# EAGLE board (transfer file) [Eagle] PCIE_Arduino_Alpha1.0 ES (EAGLE 9.6.2), part 1 of 6
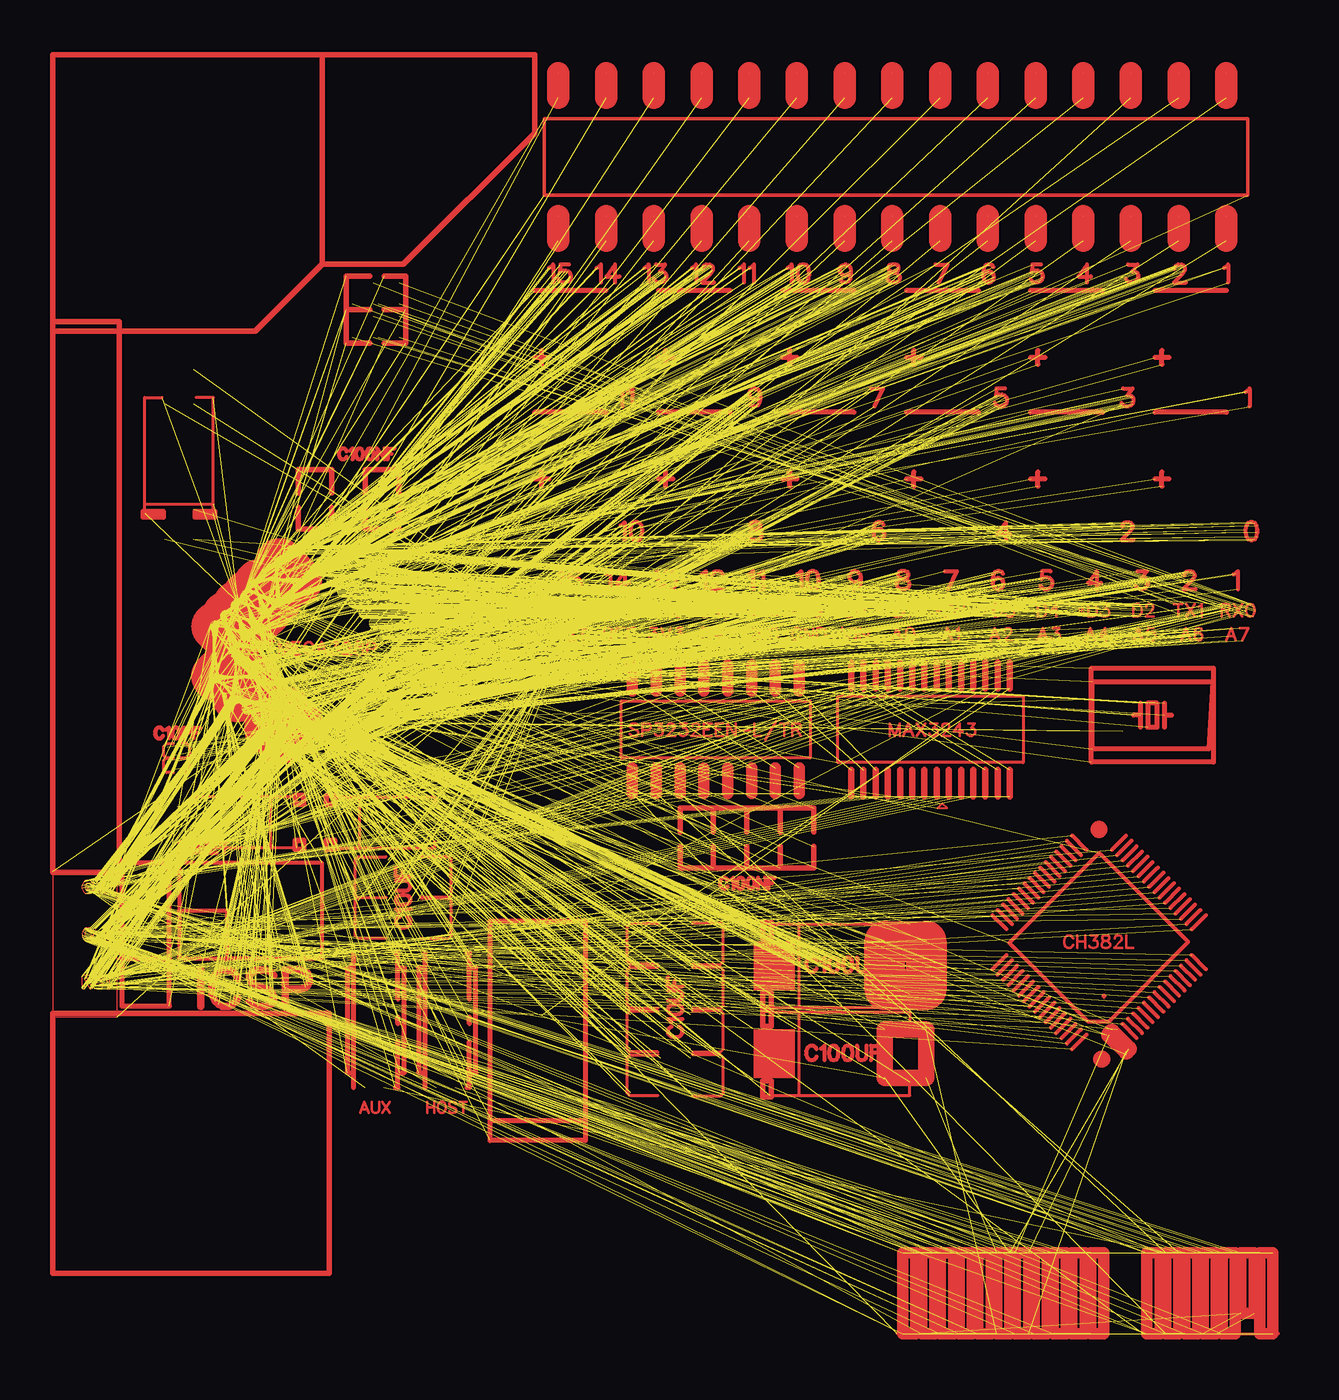
[diagram p0: board, top side]
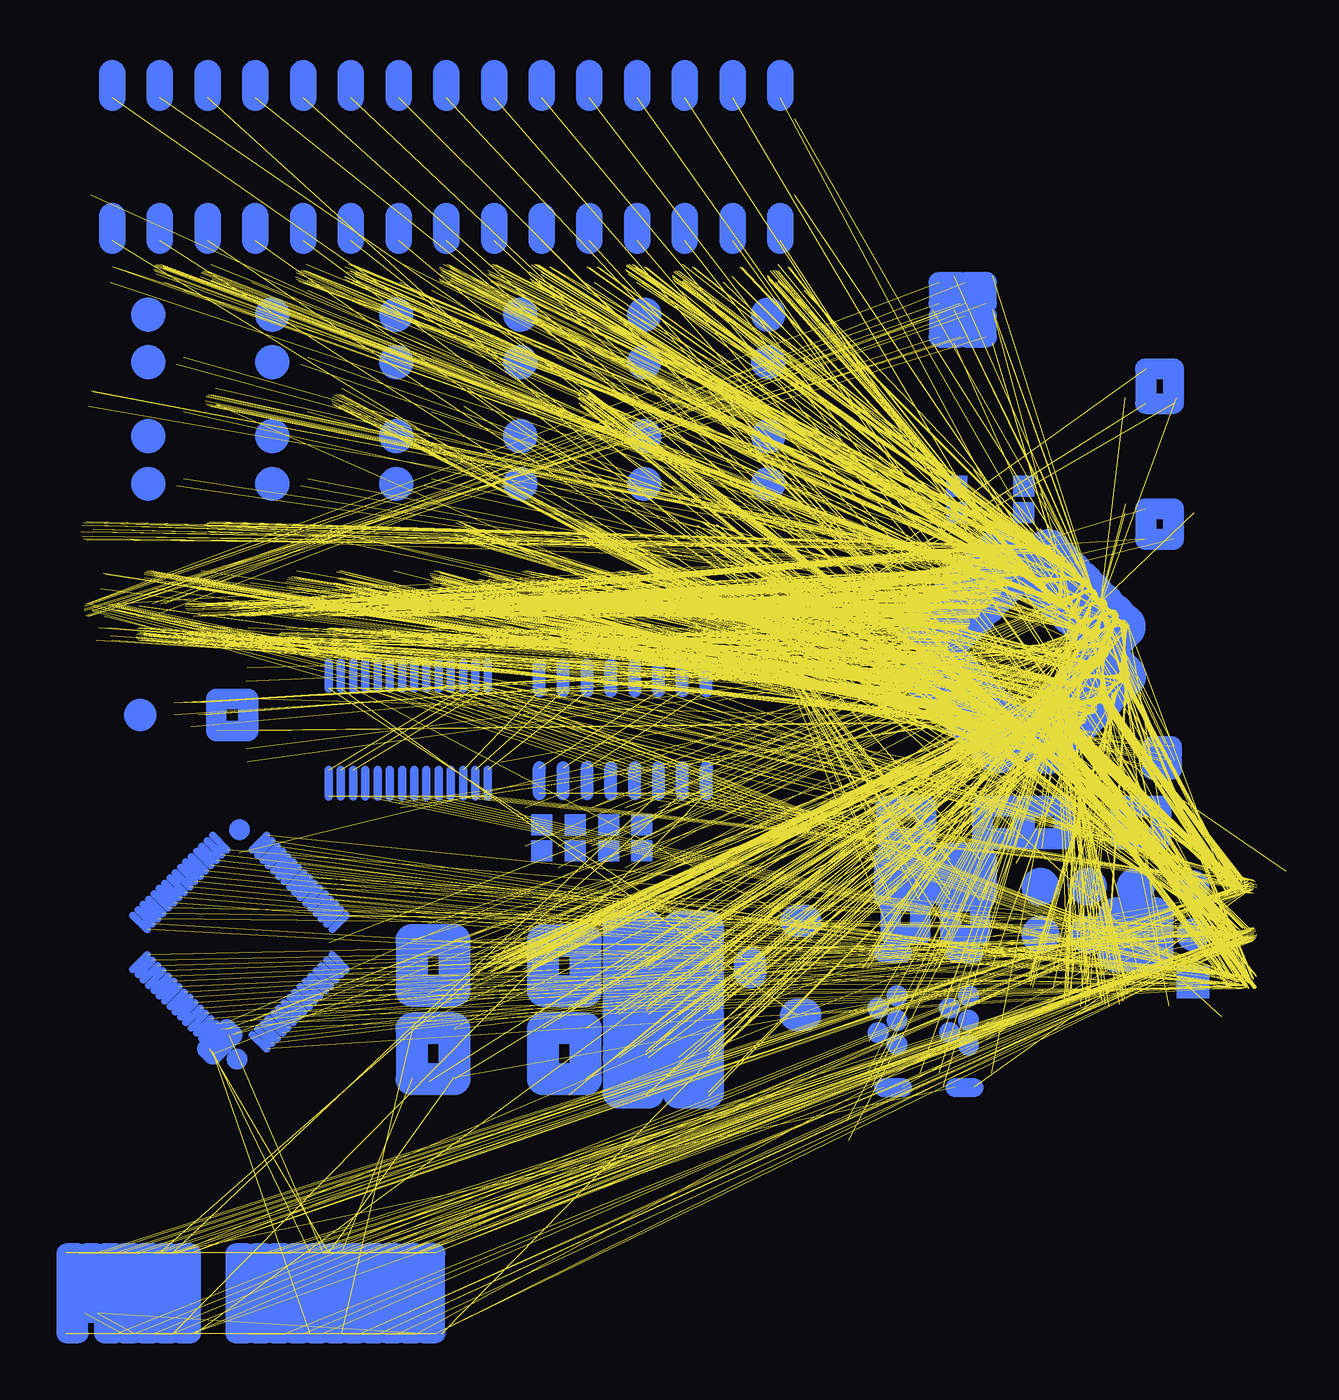
[diagram p1: board, bottom side, seen from below]

No outline drawn. Coordinates in mm, seen from the top.
Copper layers (1*16): Top 0.035mm / dielectric 1.5mm / Bottom 0.035mm
Design rules "default": minimum track width 6mil, minimum drill 0.35mm, track to track 6mil, track to pad 6mil, pad to pad 6mil, via to via 6mil, smd to smd 6mil, copper to edge 40mil, drill to drill 6mil, minimum pad ring 10mil, minimum via ring 8mil, stop-mask expansion 4mil, vias tented up to drill 0mil, thermal gap 10mil

## Placement (x,y rotation side)

## Tracks (layer width: path | path; a pad name or v marks a point on that pad's centre or on a via)
S$1  (2 unrouted)
  Top 0: 3.56,25.92 0.13,25.92
  Top 1.2: 62.61,68.42 62.61,67.12
  Bottom 1.403: 62.61,68.42 62.61,67.12
S$2  (2 unrouted)
  Top 0: 0.13,25.92 0.13,18.18
  Top 1.2: 60.07,68.42 60.07,67.12
  Bottom 1.403: 60.07,68.42 60.07,67.12
S$3  (2 unrouted)
  Top 0: 0.13,18.18 3.56,18.18
  Top 1.2: 57.53,68.42 57.53,67.12
  Bottom 1.403: 57.53,68.42 57.53,67.12
S$4  (2 unrouted)
  Top 0: 3.56,18.18 3.56,25.92
  Top 1.2: 54.99,68.42 54.99,67.12
  Bottom 1.403: 54.99,68.42 54.99,67.12
S$5  (2 unrouted)
  Top 0: 3.15,22.91 3.06,22.92
  Top 1.2: 52.45,68.42 52.45,67.12
  Bottom 1.403: 52.45,68.42 52.45,67.12
S$6  (2 unrouted)
  Top 0: 3.06,22.92 3,22.9
  Top 1.2: 49.91,68.42 49.91,67.12
  Bottom 1.403: 49.91,68.42 49.91,67.12
S$7  (2 unrouted)
  Top 0: 3,22.9 2.95,22.89
  Top 1.2: 47.37,68.42 47.37,67.12
  Bottom 1.403: 47.37,68.42 47.37,67.12
S$8  (2 unrouted)
  Top 0: 2.95,22.89 2.9,22.83
  Top 1.2: 39.75,68.42 39.75,67.12
  Bottom 1.403: 39.75,68.42 39.75,67.12
S$9  (2 unrouted)
  Top 0: 2.9,22.83 2.85,22.78
  Top 1.2: 62.61,60.8 62.61,59.5
  Bottom 1.403: 62.61,60.8 62.61,59.5
S$10  (2 unrouted)
  Top 0: 2.85,22.78 2.87,22.65
  Top 1.2: 60.07,60.8 60.07,59.5
  Bottom 1.403: 60.07,60.8 60.07,59.5
S$11  (2 unrouted)
  Top 0: 2.87,22.65 2.93,22.57
  Top 1.2: 57.53,60.8 57.53,59.5
  Bottom 1.403: 57.53,60.8 57.53,59.5
S$12  (2 unrouted)
  Top 0: 2.93,22.57 3,22.54
  Top 1.2: 54.99,60.8 54.99,59.5
  Bottom 1.403: 54.99,60.8 54.99,59.5
S$13  (2 unrouted)
  Top 0: 3,22.54 3.02,22.52
  Top 1.2: 52.45,60.8 52.45,59.5
  Bottom 1.403: 52.45,60.8 52.45,59.5
S$14  (2 unrouted)
  Top 0: 3.02,22.52 3.04,22.51
  Top 1.2: 49.91,60.8 49.91,59.5
  Bottom 1.403: 49.91,60.8 49.91,59.5
S$15  (2 unrouted)
  Top 0: 3.04,22.51 3.06,22.51
  Top 1.2: 47.37,60.8 47.37,59.5
  Bottom 1.403: 47.37,60.8 47.37,59.5
S$16  (2 unrouted)
  Top 0: 3.06,22.51 3.08,22.51
  Top 1.2: 44.83,60.8 44.83,59.5
  Bottom 1.403: 44.83,60.8 44.83,59.5
S$17  (2 unrouted)
  Top 0: 3.08,22.51 3.09,22.5
  Top 1.2: 42.29,60.8 42.29,59.5
  Bottom 1.403: 42.29,60.8 42.29,59.5
S$18  (2 unrouted)
  Top 0: 3.09,22.5 3.11,22.5
  Top 1.2: 39.75,60.8 39.75,59.5
  Bottom 1.403: 39.75,60.8 39.75,59.5
S$19  (2 unrouted)
  Top 0: 3.11,22.5 3.13,22.49
  Top 1.2: 37.21,68.42 37.21,67.12
  Bottom 1.403: 37.21,68.42 37.21,67.12
S$20  (2 unrouted)
  Top 0: 3.13,22.49 3.16,22.48
  Top 1.2: 34.67,68.42 34.67,67.12
  Bottom 1.403: 34.67,68.42 34.67,67.12
S$21  (2 unrouted)
  Top 0: 3.16,22.48 3.22,22.45
  Top 1.2: 32.13,68.42 32.13,67.12
  Bottom 1.403: 32.13,68.42 32.13,67.12
S$22  (2 unrouted)
  Top 0: 3.22,22.45 3.24,22.39
  Top 1.2: 29.59,68.42 29.59,67.12
  Bottom 1.403: 29.59,68.42 29.59,67.12
S$23  (2 unrouted)
  Top 0: 3.24,22.39 3.18,22.35
  Top 1.2: 27.05,68.42 27.05,67.12
  Bottom 1.403: 27.05,68.42 27.05,67.12
S$24  (2 unrouted)
  Top 0: 3.18,22.35 3.05,22.35
  Top 1.2: 37.21,60.8 37.21,59.5
  Bottom 1.403: 37.21,60.8 37.21,59.5
S$25  (2 unrouted)
  Top 0: 3.05,22.35 3.01,22.39
  Top 1.2: 34.67,60.8 34.67,59.5
  Bottom 1.403: 34.67,60.8 34.67,59.5
S$26  (2 unrouted)
  Top 0: 3.01,22.39 2.96,22.42
  Top 1.2: 32.13,60.8 32.13,59.5
  Bottom 1.403: 32.13,60.8 32.13,59.5
S$27  (2 unrouted)
  Top 0: 2.96,22.42 2.88,22.42
  Top 1.2: 29.59,60.8 29.59,59.5
  Bottom 1.403: 29.59,60.8 29.59,59.5
S$28  (2 unrouted)
  Top 0: 2.88,22.42 2.85,22.33
  Top 1.2: 27.05,60.8 27.05,59.5
  Bottom 1.403: 27.05,60.8 27.05,59.5
S$29  (2 unrouted)
  Top 0: 2.85,22.33 2.98,22.2
  Top 1.2: 44.83,68.42 44.83,67.12
  Bottom 1.403: 44.83,68.42 44.83,67.12
S$30  (2 unrouted)
  Top 0: 2.98,22.2 3.27,22.2
  Top 1.2: 42.29,68.42 42.29,67.12
  Bottom 1.403: 42.29,68.42 42.29,67.12
S$31  (2 unrouted)
  Top 0: 3.27,22.2 3.33,22.26
  Top 0.203: 59.82,19.01 59.06,19.77
  Bottom 0.406: 59.82,19.01 59.06,19.77
S$32  (2 unrouted)
  Top 0: 3.33,22.26 3.39,22.32
  Top 0.203: 58.4,17.6 57.65,18.35
  Bottom 0.406: 58.4,17.6 57.65,18.35
S$33  (2 unrouted)
  Top 0: 3.39,22.32 3.39,22.45
  Top 0.203: 61.23,20.43 60.48,21.18
  Bottom 0.406: 61.23,20.43 60.48,21.18
S$34  (2 unrouted)
  Top 0: 3.39,22.45 3.36,22.5
  Top 0.203: 60.95,20.14 60.2,20.9
  Bottom 0.406: 60.95,20.14 60.2,20.9
S$35  (2 unrouted)
  Top 0: 3.36,22.5 3.33,22.56
  Top 0.203: 60.38,19.58 59.63,20.33
  Bottom 0.406: 60.38,19.58 59.63,20.33
S$36  (2 unrouted)
  Top 0: 3.33,22.56 3.29,22.58
  Top 0.203: 60.1,19.3 59.35,20.05
  Bottom 0.406: 60.1,19.3 59.35,20.05
S$37  (2 unrouted)
  Top 0: 3.29,22.58 3.26,22.59
  Top 0.203: 58.69,17.88 57.93,18.64
  Bottom 0.406: 58.69,17.88 57.93,18.64
S$38  (2 unrouted)
  Top 0: 3.26,22.59 3.23,22.61
  Top 0.203: 58.97,18.16 58.22,18.92
  Bottom 0.406: 58.97,18.16 58.22,18.92
S$39  (2 unrouted)
  Top 0: 3.23,22.61 3.18,22.63
  Top 0.203: 60.67,19.86 59.91,20.61
  Bottom 0.406: 60.67,19.86 59.91,20.61
S$40  (2 unrouted)
  Top 0: 3.18,22.63 3.14,22.65
  Top 0.203: 51.19,23.11 50.44,23.87
  Bottom 0.406: 51.19,23.11 50.44,23.87
S$41  (2 unrouted)
  Top 0: 3.14,22.65 3.04,22.69
  Top 0.203: 58.12,17.32 57.37,18.07
  Bottom 0.406: 58.12,17.32 57.37,18.07
S$42  (2 unrouted)
  Top 0: 3.04,22.69 3.03,22.72
  Top 0.203: 56.52,27.07 57.27,27.83
  Bottom 0.406: 56.52,27.07 57.27,27.83
S$43  (2 unrouted)
  Top 0: 3.03,22.72 3.03,22.74
  Top 0.203: 50.15,20.71 50.91,21.46
  Bottom 0.406: 50.15,20.71 50.91,21.46
S$44  (2 unrouted)
  Top 0: 3.03,22.74 3.09,22.76
  Top 0.203: 57.56,16.75 56.8,17.5
  Bottom 0.406: 57.56,16.75 56.8,17.5
S$45  (2 unrouted)
  Top 0: 3.09,22.76 3.15,22.77
  Top 0.203: 60.2,23.4 60.95,24.15
  Bottom 0.406: 60.2,23.4 60.95,24.15
S$46  (2 unrouted)
  Top 0: 3.15,22.77 3.23,22.73
  Top 0.203: 59.25,18.45 58.5,19.2
  Bottom 0.406: 59.25,18.45 58.5,19.2
S$47  (2 unrouted)
  Top 0: 3.23,22.73 3.3,22.69
  Top 0.203: 53.55,17.32 54.3,18.07
  Bottom 0.406: 53.55,17.32 54.3,18.07
S$48  (2 unrouted)
  Top 0: 3.3,22.69 3.33,22.7
  Top 0.203: 52.13,18.73 52.89,19.48
  Bottom 0.406: 52.13,18.73 52.89,19.48
S$49  (2 unrouted)
  Top 0: 3.33,22.7 3.34,22.7
  Top 0.203: 50.91,22.83 50.15,23.59
  Bottom 0.406: 50.91,22.83 50.15,23.59
S$50  (2 unrouted)
  Top 0: 3.34,22.7 3.36,22.71
  Top 0.203: 55.15,27.07 54.4,27.83
  Bottom 0.406: 55.15,27.07 54.4,27.83
S$51  (2 unrouted)
  Top 0: 3.36,22.71 3.37,22.72
  Top 0.203: 57.84,17.03 57.08,17.79
  Bottom 0.406: 57.84,17.03 57.08,17.79
S$52  (2 unrouted)
  Top 0: 3.37,22.72 3.38,22.73
  Top 0.203: 61.52,20.71 60.76,21.46
  Bottom 0.406: 61.52,20.71 60.76,21.46
S$53  (2 unrouted)
  Top 0: 3.38,22.73 3.4,22.76
  Top 0.203: 54.11,16.75 54.87,17.5
  Bottom 0.406: 54.11,16.75 54.87,17.5
S$54  (2 unrouted)
  Top 0: 3.4,22.76 3.37,22.8
  Top 0.203: 53.83,17.03 54.59,17.79
  Bottom 0.406: 53.83,17.03 54.59,17.79
S$55  (2 unrouted)
  Top 0: 3.37,22.8 3.35,22.82
  Top 0.203: 59.53,18.73 58.78,19.48
  Bottom 0.406: 59.53,18.73 58.78,19.48
S$56  (2 unrouted)
  Top 0: 3.35,22.82 3.33,22.84
  Top 0.203: 59.91,23.68 60.67,24.43
  Bottom 0.406: 59.91,23.68 60.67,24.43
S$57  (2 unrouted)
  Top 0: 3.33,22.84 3.31,22.86
  Top 0.203: 59.63,23.96 60.38,24.72
  Bottom 0.406: 59.63,23.96 60.38,24.72
S$58  (2 unrouted)
  Top 0: 3.31,22.86 3.3,22.88
  Top 0.203: 52.61,24.53 51.85,25.28
  Bottom 0.406: 52.61,24.53 51.85,25.28
S$59  (2 unrouted)
  Top 0: 3.3,22.88 3.25,22.9
  Top 0.203: 52.89,24.81 52.13,25.56
  Bottom 0.406: 52.89,24.81 52.13,25.56
S$60  (2 unrouted)
  Top 0: 3.25,22.9 3.15,22.91
  Top 0.203: 52.32,24.24 51.57,25
  Bottom 0.406: 52.32,24.24 51.57,25
S$61  (2 unrouted)
  Top 0: 2.7,20.34 2.64,20.38
  Top 0.203: 51.76,23.68 51,24.43
  Bottom 0.406: 51.76,23.68 51,24.43
S$62  (2 unrouted)
  Top 0: 2.64,20.38 2.54,20.38
  Top 0.203: 53.17,25.09 52.42,25.85
  Bottom 0.406: 53.17,25.09 52.42,25.85
S$63  (2 unrouted)
  Top 0: 2.54,20.38 2.47,20.37
  Top 0.203: 53.45,25.38 52.7,26.13
  Bottom 0.406: 53.45,25.38 52.7,26.13
S$64  (2 unrouted)
  Top 0: 2.47,20.37 2.42,20.36
  Top 0.203: 51.47,23.4 50.72,24.15
  Bottom 0.406: 51.47,23.4 50.72,24.15
S$65  (2 unrouted)
  Top 0: 2.42,20.36 2.38,20.35
  Top 0.203: 52.04,23.96 51.29,24.72
  Bottom 0.406: 52.04,23.96 51.29,24.72
S$66  (2 unrouted)
  Top 0: 2.38,20.35 2.34,20.32
  Top 0.203: 57.93,25.66 58.69,26.41
  Bottom 0.406: 57.93,25.66 58.69,26.41
S$67  (2 unrouted)
  Top 0: 2.34,20.32 2.29,20.29
  Top 0.203: 56.8,26.79 57.55,27.54
  Bottom 0.406: 56.8,26.79 57.55,27.54
S$68  (2 unrouted)
  Top 0: 2.29,20.29 2.27,20.24
  Top 0.203: 57.08,26.51 57.84,27.26
  Bottom 0.406: 57.08,26.51 57.84,27.26
S$69  (2 unrouted)
  Top 0: 2.27,20.24 2.25,20.2
  Top 0.203: 57.65,25.94 58.4,26.7
  Bottom 0.406: 57.65,25.94 58.4,26.7
S$70  (2 unrouted)
  Top 0: 2.25,20.2 2.29,20.07
  Top 0.203: 57.37,26.22 58.12,26.98
  Bottom 0.406: 57.37,26.22 58.12,26.98
S$71  (2 unrouted)
  Top 0: 2.29,20.07 2.38,20.01
  Top 0.203: 50.72,20.14 51.47,20.9
  Bottom 0.406: 50.72,20.14 51.47,20.9
S$72  (2 unrouted)
  Top 0: 2.38,20.01 2.62,19.92
  Top 0.203: 50.44,20.43 51.19,21.18
  Bottom 0.406: 50.44,20.43 51.19,21.18
S$73  (2 unrouted)
  Top 0: 2.62,19.92 2.64,19.84
  Top 0.203: 51,19.86 51.76,20.61
  Bottom 0.406: 51,19.86 51.76,20.61
S$74  (2 unrouted)
  Top 0: 2.64,19.84 2.61,19.82
  Top 0.203: 52.98,17.88 53.74,18.64
  Bottom 0.406: 52.98,17.88 53.74,18.64
S$75  (2 unrouted)
  Top 0: 2.61,19.82 2.6,19.82
  Top 0.203: 53.27,17.6 54.02,18.35
  Bottom 0.406: 53.27,17.6 54.02,18.35
S$76  (2 unrouted)
  Top 0: 2.6,19.82 2.58,19.81
  Top 0.203: 58.78,24.81 59.53,25.56
  Bottom 0.406: 58.78,24.81 59.53,25.56
S$77  (2 unrouted)
  Top 0: 2.58,19.81 2.56,19.81
  Top 0.203: 52.7,18.16 53.45,18.92
  Bottom 0.406: 52.7,18.16 53.45,18.92
S$78  (2 unrouted)
  Top 0: 2.56,19.81 2.53,19.81
  Top 0.203: 52.42,18.45 53.17,19.2
  Bottom 0.406: 52.42,18.45 53.17,19.2
S$79  (2 unrouted)
  Top 0: 2.53,19.81 2.47,19.81
  Top 0.203: 59.06,24.53 59.82,25.28
  Bottom 0.406: 59.06,24.53 59.82,25.28
S$80  (2 unrouted)
  Top 0: 2.47,19.81 2.42,19.84
  Top 0.203: 58.5,25.09 59.25,25.85
  Bottom 0.406: 58.5,25.09 59.25,25.85
S$81  (2 unrouted)
  Top 0: 2.42,19.84 2.38,19.88
  Top 0.203: 58.22,25.38 58.97,26.13
  Bottom 0.406: 58.22,25.38 58.97,26.13
S$82  (2 unrouted)
  Top 0: 2.38,19.88 2.29,19.88
  Top 0.203: 59.35,24.24 60.1,25
  Bottom 0.406: 59.35,24.24 60.1,25
S$83  (2 unrouted)
  Top 0: 2.29,19.88 2.28,19.85
  Top 0.203: 54.4,16.47 55.15,17.22
  Bottom 0.406: 54.4,16.47 55.15,17.22
S$84  (2 unrouted)
  Top 0: 2.28,19.85 2.27,19.82
  Top 0.203: 53.74,25.66 52.98,26.41
  Bottom 0.406: 53.74,25.66 52.98,26.41
S$85  (2 unrouted)
  Top 0: 2.27,19.82 2.28,19.79
  Top 0.203: 54.59,26.51 53.83,27.26
  Bottom 0.406: 54.59,26.51 53.83,27.26
S$86  (2 unrouted)
  Top 0: 2.28,19.79 2.29,19.77
  Top 0.203: 54.02,25.94 53.27,26.7
  Bottom 0.406: 54.02,25.94 53.27,26.7
S$87  (2 unrouted)
  Top 0: 2.29,19.77 2.31,19.74
  Top 0.203: 51.85,19.01 52.61,19.77
  Bottom 0.406: 51.85,19.01 52.61,19.77
S$88  (2 unrouted)
  Top 0: 2.31,19.74 2.35,19.7
  Top 0.203: 60.76,22.83 61.52,23.59
  Bottom 0.406: 60.76,22.83 61.52,23.59
S$89  (2 unrouted)
  Top 0: 2.35,19.7 2.41,19.68
  Top 0.203: 60.48,23.11 61.23,23.87
  Bottom 0.406: 60.48,23.11 61.23,23.87
S$90  (2 unrouted)
  Top 0: 2.41,19.68 2.47,19.66
  Top 0.203: 54.3,26.22 53.55,26.98
  Bottom 0.406: 54.3,26.22 53.55,26.98
S$91  (2 unrouted)
  Top 0: 2.47,19.66 2.53,19.66
  Top 0.203: 51.57,19.3 52.32,20.05
  Bottom 0.406: 51.57,19.3 52.32,20.05
S$92  (2 unrouted)
  Top 0: 2.53,19.66 2.59,19.66
  Top 0.203: 54.87,26.79 54.11,27.54
  Bottom 0.406: 54.87,26.79 54.11,27.54
S$93  (2 unrouted)
  Top 0: 2.59,19.66 2.65,19.68
  Top 0.203: 51.29,19.58 52.04,20.33
  Bottom 0.406: 51.29,19.58 52.04,20.33
S$94  (2 unrouted)
  Top 0: 2.65,19.68 2.72,19.7
  Top 0.343: 51.09,35.65 51.09,37.04
  Bottom 1.727: 28.66,20.54 28.66,21.02
S$95  (2 unrouted)
  Top 0: 2.72,19.7 2.77,19.75
  Top 0.343: 50.44,35.65 50.44,37.04
  Bottom 1.727: 25.72,18.28 26.19,18.28
S$96  (2 unrouted)
  Top 0: 2.77,19.75 2.81,19.8
  Top 0.343: 49.79,35.65 49.79,37.04
  Bottom 1.727: 25.72,23.28 26.19,23.28
S$97  (2 unrouted)
  Top 0: 2.81,19.8 2.81,19.9
  Top 0.343: 49.14,35.65 49.14,37.04
  Bottom 0.445: 51.09,35.65 51.09,37.04
S$98  (2 unrouted)
  Top 0: 2.81,19.9 2.77,19.96
  Top 0.343: 48.49,35.65 48.49,37.04
  Bottom 0.445: 50.44,35.65 50.44,37.04
S$99  (2 unrouted)
  Top 0: 2.77,19.96 2.73,20.03
  Top 0.343: 47.84,35.65 47.84,37.04
  Bottom 0.445: 49.79,35.65 49.79,37.04
S$100  (2 unrouted)
  Top 0: 2.73,20.03 2.69,20.05
  Top 0.343: 47.19,35.65 47.19,37.04
  Bottom 0.445: 49.14,35.65 49.14,37.04
S$101  (2 unrouted)
  Top 0: 2.69,20.05 2.66,20.06
  Top 0.343: 46.54,35.65 46.54,37.04
  Bottom 0.445: 48.49,35.65 48.49,37.04
S$102  (2 unrouted)
  Top 0: 2.66,20.06 2.63,20.08
  Top 0.343: 45.89,35.65 45.89,37.04
  Bottom 0.445: 47.84,35.65 47.84,37.04
S$103  (2 unrouted)
  Top 0: 2.63,20.08 2.58,20.09
  Top 0.343: 45.24,35.65 45.24,37.04
  Bottom 0.445: 47.19,35.65 47.19,37.04
S$104  (2 unrouted)
  Top 0: 2.58,20.09 2.54,20.11
  Top 0.343: 44.59,35.65 44.59,37.04
  Bottom 0.445: 46.54,35.65 46.54,37.04
S$105  (2 unrouted)
  Top 0: 2.54,20.11 2.44,20.14
  Top 0.343: 43.94,35.65 43.94,37.04
  Bottom 0.445: 45.89,35.65 45.89,37.04
S$106  (2 unrouted)
  Top 0: 2.44,20.14 2.44,20.21
  Top 0.343: 43.29,35.65 43.29,37.04
  Bottom 0.445: 45.24,35.65 45.24,37.04
S$107  (2 unrouted)
  Top 0: 2.44,20.21 2.52,20.22
  Top 0.343: 42.64,35.65 42.64,37.04
  Bottom 0.445: 44.59,35.65 44.59,37.04
S$108  (2 unrouted)
  Top 0: 2.52,20.22 2.6,20.22
  Top 0.343: 51.09,29.92 51.09,31.31
  Bottom 0.445: 43.94,35.65 43.94,37.04
S$109  (2 unrouted)
  Top 0: 2.6,20.22 2.7,20.15
  Top 0.343: 50.44,29.92 50.44,31.31
  Bottom 0.445: 43.29,35.65 43.29,37.04
S$110  (2 unrouted)
  Top 0: 2.7,20.15 2.77,20.15
  Top 0.343: 49.79,29.92 49.79,31.31
  Bottom 0.445: 42.64,35.65 42.64,37.04
S$111  (2 unrouted)
  Top 0: 2.77,20.15 2.79,20.19
  Top 0.343: 49.14,29.92 49.14,31.31
  Bottom 0.445: 51.09,29.92 51.09,31.31
S$112  (2 unrouted)
  Top 0: 2.79,20.19 2.81,20.22
  Top 0.343: 48.49,29.92 48.49,31.31
  Bottom 0.445: 50.44,29.92 50.44,31.31
S$113  (2 unrouted)
  Top 0: 2.81,20.22 2.78,20.27
  Top 0.343: 47.84,29.92 47.84,31.31
  Bottom 0.445: 49.79,29.92 49.79,31.31
S$114  (2 unrouted)
  Top 0: 2.78,20.27 2.77,20.29
  Top 0.343: 47.19,29.92 47.19,31.31
  Bottom 0.445: 49.14,29.92 49.14,31.31
S$115  (2 unrouted)
  Top 0: 2.77,20.29 2.75,20.31
  Top 0.343: 46.54,29.92 46.54,31.31
  Bottom 0.445: 48.49,29.92 48.49,31.31
S$116  (2 unrouted)
  Top 0: 2.75,20.31 2.72,20.33
  Top 0.343: 45.89,29.92 45.89,31.31
  Bottom 0.445: 47.84,29.92 47.84,31.31
S$117  (2 unrouted)
  Top 0: 2.72,20.33 2.7,20.34
  Top 0.343: 45.24,29.92 45.24,31.31
  Bottom 0.445: 47.19,29.92 47.19,31.31
S$118  (2 unrouted)
  Top 0: 2.03,25.45 1.94,25.46
  Top 0.343: 44.59,29.92 44.59,31.31
  Bottom 0.445: 46.54,29.92 46.54,31.31
S$119  (2 unrouted)
  Top 0: 1.94,25.46 1.9,25.45
  Top 0.343: 43.94,29.92 43.94,31.31
  Bottom 0.445: 45.89,29.92 45.89,31.31
S$120  (2 unrouted)
  Top 0: 1.9,25.45 1.88,25.44
  Top 0.343: 43.29,29.92 43.29,31.31
  Bottom 0.445: 45.24,29.92 45.24,31.31
S$121  (2 unrouted)
  Top 0: 1.88,25.44 1.86,25.43
  Top 0.343: 42.64,29.92 42.64,31.31
  Bottom 0.445: 44.59,29.92 44.59,31.31
S$122  (2 unrouted)
  Top 0: 1.86,25.43 1.84,25.41
  Top 0.602: 39.88,35.53 39.88,36.9
  Bottom 0.445: 43.94,29.92 43.94,31.31
S$123  (2 unrouted)
  Top 0: 1.84,25.41 1.82,25.39
  Top 0.602: 38.61,35.53 38.61,36.9
  Bottom 0.445: 43.29,29.92 43.29,31.31
S$124  (2 unrouted)
  Top 0: 1.82,25.39 1.77,25.36
  Top 0.602: 37.34,35.53 37.34,36.9
  Bottom 0.445: 42.64,29.92 42.64,31.31
S$125  (2 unrouted)
  Top 0: 1.77,25.36 1.69,25.16
  Top 0.602: 36.07,35.53 36.07,36.9
  Bottom 0.704: 39.88,35.53 39.88,36.9
S$126  (2 unrouted)
  Top 0: 1.69,25.16 1.69,25.04
  Top 0.602: 34.8,35.53 34.8,36.9
  Bottom 0.704: 38.61,35.53 38.61,36.9
S$127  (2 unrouted)
  Top 0: 1.69,25.04 1.76,24.85
  Top 0.602: 33.53,35.53 33.53,36.9
  Bottom 0.704: 37.34,35.53 37.34,36.9
S$128  (2 unrouted)
  Top 0: 1.76,24.85 1.87,24.76
  Top 0.602: 32.26,35.53 32.26,36.9
  Bottom 0.704: 36.07,35.53 36.07,36.9
S$129  (2 unrouted)
  Top 0: 1.87,24.76 1.98,24.73
  Top 0.602: 30.99,35.53 30.99,36.9
  Bottom 0.704: 34.8,35.53 34.8,36.9
S$130  (2 unrouted)
  Top 0: 1.98,24.73 2.06,24.74
  Top 0.602: 39.88,30.06 39.88,31.43
  Bottom 0.704: 33.53,35.53 33.53,36.9
S$131  (2 unrouted)
  Top 0: 2.06,24.74 2.13,24.75
  Top 0.602: 38.61,30.06 38.61,31.43
  Bottom 0.704: 32.26,35.53 32.26,36.9
S$132  (2 unrouted)
  Top 0: 2.13,24.75 2.25,24.89
  Top 0.602: 37.34,30.06 37.34,31.43
  Bottom 0.704: 30.99,35.53 30.99,36.9
S$133  (2 unrouted)
  Top 0: 2.25,24.89 2.27,24.95
  Top 0.602: 36.07,30.06 36.07,31.43
  Bottom 0.704: 39.88,30.06 39.88,31.43
S$134  (2 unrouted)
  Top 0: 2.27,24.95 2.28,25.02
  Top 0.602: 34.8,30.06 34.8,31.43
  Bottom 0.704: 38.61,30.06 38.61,31.43
S$135  (2 unrouted)
  Top 0: 2.28,25.02 2.26,25.06
  Top 0.602: 33.53,30.06 33.53,31.43
  Bottom 0.704: 37.34,30.06 37.34,31.43
S$136  (2 unrouted)
  Top 0: 2.26,25.06 2.24,25.1
  Top 0.602: 32.26,30.06 32.26,31.43
  Bottom 0.704: 36.07,30.06 36.07,31.43
S$137  (2 unrouted)
  Top 0: 2.24,25.1 2,25.1
  Top 0.602: 30.99,30.06 30.99,31.43
  Bottom 0.704: 34.8,30.06 34.8,31.43
S$138  (2 unrouted)
  Top 0: 2,25.1 1.99,25.06
  Top 0.602: 59.38,5.6 60.09,5.6
  Bottom 0.704: 33.53,30.06 33.53,31.43
S$139  (2 unrouted)
  Top 0: 1.99,25.06 1.98,25.03
  Top 0.602: 60.09,5.6 60.09,1.3
  Bottom 0.704: 32.26,30.06 32.26,31.43
S$140  (2 unrouted)
  Top 0: 1.98,25.03 2,24.96
  Top 0.602: 60.09,1.3 59.38,1.3
  Bottom 0.704: 30.99,30.06 30.99,31.43
S$141  (2 unrouted)
  Top 0: 2,24.96 2.04,24.95
  Top 0.602: 59.38,1.3 59.38,5.6
  Bottom 1.003: 17.75,14.41 16.75,14.41
S$142  (2 unrouted)
  Top 0: 2.04,24.95 2.09,24.94
  Top 0.602: 58.38,5.6 59.09,5.6
  Bottom 1.003: 17.75,21.57 16.75,21.57
S$143  (2 unrouted)
  Top 0: 2.09,24.94 2.08,24.92
  Top 0.602: 59.09,5.6 59.09,1.3
  Bottom 1.003: 21.56,21.57 20.56,21.57
S$144  (2 unrouted)
  Top 0: 2.08,24.92 2.07,24.9
  Top 0.602: 59.09,1.3 58.38,1.3
  Bottom 1.003: 21.56,14.41 20.56,14.41
S$145  (2 unrouted)
  Top 0: 2.07,24.9 1.92,24.9
  Top 0.602: 58.38,1.3 58.38,5.6
  Bottom 1.003: 59.38,5.6 60.09,5.6
S$146  (2 unrouted)
  Top 0: 1.92,24.9 1.89,24.96
  Top 0.602: 60.38,5.6 61.09,5.6
  Bottom 1.003: 60.09,5.6 60.09,1.3
S$147  (2 unrouted)
  Top 0: 1.89,24.96 1.86,25.02
  Top 0.602: 61.09,5.6 61.09,1.3
  Bottom 1.003: 60.09,1.3 59.38,1.3
S$148  (2 unrouted)
  Top 0: 1.86,25.02 1.85,25.09
  Top 0.602: 61.09,1.3 60.38,1.3
  Bottom 1.003: 59.38,1.3 59.38,5.6
S$149  (2 unrouted)
  Top 0: 1.85,25.09 1.85,25.16
  Top 0.602: 60.38,1.3 60.38,5.6
  Bottom 1.003: 58.38,5.6 59.09,5.6
S$150  (2 unrouted)
  Top 0: 1.85,25.16 1.88,25.22
  Top 0.602: 62.38,5.6 63.09,5.6
  Bottom 1.003: 59.09,5.6 59.09,1.3
S$151  (2 unrouted)
  Top 0: 1.88,25.22 1.91,25.28
  Top 0.602: 63.09,5.6 63.09,1.3
  Bottom 1.003: 59.09,1.3 58.38,1.3
S$152  (2 unrouted)
  Top 0: 1.91,25.28 1.96,25.3
  Top 0.602: 63.09,1.3 62.38,1.3
  Bottom 1.003: 58.38,1.3 58.38,5.6
S$153  (2 unrouted)
  Top 0: 1.96,25.3 2,25.31
  Top 0.602: 62.38,1.3 62.38,5.6
  Bottom 1.003: 60.38,5.6 61.09,5.6
S$154  (2 unrouted)
  Top 0: 2,25.31 2.04,25.3
  Top 0.602: 61.38,5.6 62.09,5.6
  Bottom 1.003: 61.09,5.6 61.09,1.3
S$155  (2 unrouted)
  Top 0: 2.04,25.3 2.08,25.28
  Top 0.602: 62.09,5.6 62.09,1.3
  Bottom 1.003: 61.09,1.3 60.38,1.3
S$156  (2 unrouted)
  Top 0: 2.08,25.28 2.08,25.27
  Top 0.602: 62.09,1.3 61.38,1.3
  Bottom 1.003: 60.38,1.3 60.38,5.6
S$157  (2 unrouted)
  Top 0: 2.08,25.27 2.1,25.24
  Top 0.602: 61.38,1.3 61.38,5.6
  Bottom 1.003: 62.38,5.6 63.09,5.6
S$158  (2 unrouted)
  Top 0: 2.1,25.24 2.13,25.21
  Top 0.602: 64.39,5.6 65.08,5.6
  Bottom 1.003: 63.09,5.6 63.09,1.3
S$159  (2 unrouted)
  Top 0: 2.13,25.21 2.16,25.18
  Top 0.602: 65.08,5.6 65.08,1.3
  Bottom 1.003: 63.09,1.3 62.38,1.3
S$160  (2 unrouted)
  Top 0: 2.16,25.18 2.19,25.17
  Top 0.602: 65.08,1.3 64.39,1.3
  Bottom 1.003: 62.38,1.3 62.38,5.6
S$161  (2 unrouted)
  Top 0: 2.19,25.17 2.2,25.17
  Top 0.602: 64.39,1.3 64.39,5.6
  Bottom 1.003: 61.38,5.6 62.09,5.6
S$162  (2 unrouted)
  Top 0: 2.2,25.17 2.21,25.18
  Top 0.602: 63.38,5.6 64.08,5.6
  Bottom 1.003: 62.09,5.6 62.09,1.3
S$163  (2 unrouted)
  Top 0: 2.21,25.18 2.22,25.19
  Top 0.602: 64.08,5.6 64.08,2.4
  Bottom 1.003: 62.09,1.3 61.38,1.3
S$164  (2 unrouted)
  Top 0: 2.22,25.19 2.24,25.2
  Top 0.602: 64.08,2.4 63.38,2.4
  Bottom 1.003: 61.38,1.3 61.38,5.6
S$165  (2 unrouted)
  Top 0: 2.24,25.2 2.27,25.23
  Top 0.602: 63.38,2.4 63.38,5.6
  Bottom 1.003: 64.39,5.6 65.08,5.6
S$166  (2 unrouted)
  Top 0: 2.27,25.23 2.23,25.34
  Top 0.602: 46.38,5.6 47.09,5.6
  Bottom 1.003: 65.08,5.6 65.08,1.3
S$167  (2 unrouted)
  Top 0: 2.23,25.34 2.18,25.39
  Top 0.602: 47.09,5.6 47.09,1.3
  Bottom 1.003: 65.08,1.3 64.39,1.3
S$168  (2 unrouted)
  Top 0: 2.18,25.39 2.12,25.44
  Top 0.602: 47.09,1.3 46.38,1.3
  Bottom 1.003: 64.39,1.3 64.39,5.6
S$169  (2 unrouted)
  Top 0: 2.12,25.44 2.03,25.45
  Top 0.602: 46.38,1.3 46.38,5.6
  Bottom 1.003: 63.38,5.6 64.08,5.6
S$170  (2 unrouted)
  Top 0: 2.02,22.91 1.92,22.92
  Top 0.602: 45.38,5.6 46.09,5.6
  Bottom 1.003: 64.08,5.6 64.08,2.4
S$171  (2 unrouted)
  Top 0: 1.92,22.92 1.89,22.9
  Top 0.602: 46.09,5.6 46.09,1.3
  Bottom 1.003: 64.08,2.4 63.38,2.4
S$172  (2 unrouted)
  Top 0: 1.89,22.9 1.87,22.89
  Top 0.602: 46.09,1.3 45.38,1.3
  Bottom 1.003: 63.38,2.4 63.38,5.6
S$173  (2 unrouted)
  Top 0: 1.87,22.89 1.85,22.88
  Top 0.602: 45.38,1.3 45.38,5.6
  Bottom 1.003: 46.38,5.6 47.09,5.6
S$174  (2 unrouted)
  Top 0: 1.85,22.88 1.83,22.86
  Top 0.602: 47.38,5.6 48.09,5.6
  Bottom 1.003: 47.09,5.6 47.09,1.3
S$175  (2 unrouted)
  Top 0: 1.83,22.86 1.81,22.85
  Top 0.602: 48.09,5.6 48.09,1.3
  Bottom 1.003: 47.09,1.3 46.38,1.3
S$176  (2 unrouted)
  Top 0: 1.81,22.85 1.77,22.81
  Top 0.602: 48.09,1.3 47.38,1.3
  Bottom 1.003: 46.38,1.3 46.38,5.6
S$177  (2 unrouted)
  Top 0: 1.77,22.81 1.73,22.71
  Top 0.602: 47.38,1.3 47.38,5.6
  Bottom 1.003: 45.38,5.6 46.09,5.6
S$178  (2 unrouted)
  Top 0: 1.73,22.71 1.69,22.62
  Top 0.602: 53.38,5.6 54.09,5.6
  Bottom 1.003: 46.09,5.6 46.09,1.3
S$179  (2 unrouted)
  Top 0: 1.69,22.62 1.7,22.54
  Top 0.602: 54.09,5.6 54.09,1.3
  Bottom 1.003: 46.09,1.3 45.38,1.3
S$180  (2 unrouted)
  Top 0: 1.7,22.54 1.7,22.5
  Top 0.602: 54.09,1.3 53.38,1.3
  Bottom 1.003: 45.38,1.3 45.38,5.6
S$181  (2 unrouted)
  Top 0: 1.7,22.5 1.71,22.46
  Top 0.602: 53.38,1.3 53.38,5.6
  Bottom 1.003: 47.38,5.6 48.09,5.6
S$182  (2 unrouted)
  Top 0: 1.71,22.46 1.72,22.43
  Top 0.602: 52.38,5.6 53.09,5.6
  Bottom 1.003: 48.09,5.6 48.09,1.3
S$183  (2 unrouted)
  Top 0: 1.72,22.43 1.73,22.39
  Top 0.602: 53.09,5.6 53.09,1.3
  Bottom 1.003: 48.09,1.3 47.38,1.3
S$184  (2 unrouted)
  Top 0: 1.73,22.39 1.75,22.33
  Top 0.602: 53.09,1.3 52.38,1.3
  Bottom 1.003: 47.38,1.3 47.38,5.6
S$185  (2 unrouted)
  Top 0: 1.75,22.33 1.81,22.27
  Top 0.602: 52.38,1.3 52.38,5.6
  Bottom 1.003: 53.38,5.6 54.09,5.6
S$186  (2 unrouted)
  Top 0: 1.81,22.27 1.86,22.21
  Top 0.602: 55.38,5.6 56.09,5.6
  Bottom 1.003: 54.09,5.6 54.09,1.3
S$187  (2 unrouted)
  Top 0: 1.86,22.21 1.92,22.2
  Top 0.602: 56.09,5.6 56.09,1.3
  Bottom 1.003: 54.09,1.3 53.38,1.3
S$188  (2 unrouted)
  Top 0: 1.92,22.2 1.98,22.19
  Top 0.602: 56.09,1.3 55.38,1.3
  Bottom 1.003: 53.38,1.3 53.38,5.6
S$189  (2 unrouted)
  Top 0: 1.98,22.19 2.05,22.2
  Top 0.602: 55.38,1.3 55.38,5.6
  Bottom 1.003: 52.38,5.6 53.09,5.6
S$190  (2 unrouted)
  Top 0: 2.05,22.2 2.12,22.21
  Top 0.602: 54.38,5.6 55.09,5.6
  Bottom 1.003: 53.09,5.6 53.09,1.3
S$191  (2 unrouted)
  Top 0: 2.12,22.21 2.24,22.33
  Top 0.602: 55.09,5.6 55.09,1.3
  Bottom 1.003: 53.09,1.3 52.38,1.3
S$192  (2 unrouted)
  Top 0: 2.24,22.33 2.26,22.45
  Top 0.602: 55.09,1.3 54.38,1.3
  Bottom 1.003: 52.38,1.3 52.38,5.6
S$193  (2 unrouted)
  Top 0: 2.26,22.45 2.22,22.47
  Top 0.602: 54.38,1.3 54.38,5.6
  Bottom 1.003: 55.38,5.6 56.09,5.6
S$194  (2 unrouted)
  Top 0: 2.22,22.47 2.19,22.49
  Top 0.602: 49.38,5.6 50.09,5.6
  Bottom 1.003: 56.09,5.6 56.09,1.3
S$195  (2 unrouted)
  Top 0: 2.19,22.49 2.16,22.47
  Top 0.602: 50.09,5.6 50.09,1.3
  Bottom 1.003: 56.09,1.3 55.38,1.3
S$196  (2 unrouted)
  Top 0: 2.16,22.47 2.14,22.46
  Top 0.602: 50.09,1.3 49.38,1.3
  Bottom 1.003: 55.38,1.3 55.38,5.6
S$197  (2 unrouted)
  Top 0: 2.14,22.46 2.13,22.45
  Top 0.602: 49.38,1.3 49.38,5.6
  Bottom 1.003: 54.38,5.6 55.09,5.6
S$198  (2 unrouted)
  Top 0: 2.13,22.45 2.11,22.43
  Top 0.602: 48.38,5.6 49.09,5.6
  Bottom 1.003: 55.09,5.6 55.09,1.3
S$199  (2 unrouted)
  Top 0: 2.11,22.43 2.1,22.41
  Top 0.602: 49.09,5.6 49.09,1.3
  Bottom 1.003: 55.09,1.3 54.38,1.3
S$200  (2 unrouted)
  Top 0: 2.1,22.41 2.08,22.37
  Top 0.602: 49.09,1.3 48.38,1.3
  Bottom 1.003: 54.38,1.3 54.38,5.6
S$201  (2 unrouted)
  Top 0: 2.08,22.37 1.98,22.35
  Top 0.602: 48.38,1.3 48.38,5.6
  Bottom 1.003: 49.38,5.6 50.09,5.6
S$202  (2 unrouted)
  Top 0: 1.98,22.35 1.95,22.36
  Top 0.602: 51.38,5.6 52.09,5.6
  Bottom 1.003: 50.09,5.6 50.09,1.3
S$203  (2 unrouted)
  Top 0: 1.95,22.36 1.91,22.37
  Top 0.602: 52.09,5.6 52.09,1.3
  Bottom 1.003: 50.09,1.3 49.38,1.3
S$204  (2 unrouted)
  Top 0: 1.91,22.37 1.86,22.48
  Top 0.602: 52.09,1.3 51.38,1.3
  Bottom 1.003: 49.38,1.3 49.38,5.6
S$205  (2 unrouted)
  Top 0: 1.86,22.48 1.85,22.55
  Top 0.602: 51.38,1.3 51.38,5.6
  Bottom 1.003: 48.38,5.6 49.09,5.6
S$206  (2 unrouted)
  Top 0: 1.85,22.55 1.85,22.62
  Top 0.602: 50.38,5.6 51.09,5.6
  Bottom 1.003: 49.09,5.6 49.09,1.3
S$207  (2 unrouted)
  Top 0: 1.85,22.62 1.91,22.74
  Top 0.602: 51.09,5.6 51.09,1.3
  Bottom 1.003: 49.09,1.3 48.38,1.3
S$208  (2 unrouted)
  Top 0: 1.91,22.74 1.96,22.75
  Top 0.602: 51.09,1.3 50.38,1.3
  Bottom 1.003: 48.38,1.3 48.38,5.6
S$209  (2 unrouted)
  Top 0: 1.96,22.75 2,22.76
  Top 0.602: 50.38,1.3 50.38,5.6
  Bottom 1.003: 51.38,5.6 52.09,5.6
S$210  (2 unrouted)
  Top 0: 2,22.76 2.04,22.75
  Top 0.889: 57.42,16.47 57.27,16.32
  Bottom 1.003: 52.09,5.6 52.09,1.3
S$211  (2 unrouted)
  Top 0: 2.04,22.75 2.08,22.74
  Top 0.889: 57.27,16.32 56.38,17.22
  Bottom 1.003: 52.09,1.3 51.38,1.3
S$212  (2 unrouted)
  Top 0: 2.08,22.74 2.1,22.7
  Top 0.889: 56.38,17.22 56.52,17.36
  Bottom 1.003: 51.38,1.3 51.38,5.6
S$213  (2 unrouted)
  Top 0: 2.1,22.7 2.11,22.68
  Top 0.889: 56.52,17.36 57.42,16.47
  Bottom 1.003: 50.38,5.6 51.09,5.6
S$214  (2 unrouted)
  Top 0: 2.11,22.68 2.13,22.66
  Top 0.889: 44.44,14.91 44.44,17.5
  Bottom 1.003: 51.09,5.6 51.09,1.3
S$215  (2 unrouted)
  Top 0: 2.13,22.66 2.14,22.65
  Top 0.889: 44.44,17.5 46.62,17.5
  Bottom 1.003: 51.09,1.3 50.38,1.3
S$216  (2 unrouted)
  Top 0: 2.14,22.65 2.16,22.64
  Top 0.889: 46.62,17.5 46.62,14.91
  Bottom 1.003: 50.38,1.3 50.38,5.6
S$217  (2 unrouted)
  Top 0: 2.16,22.64 2.19,22.62
  Top 0.889: 46.62,14.91 44.44,14.91
  Bottom 2.003: 7.13,21.56 7.13,23.56
S$218  (2 unrouted)
  Top 0: 2.19,22.62 2.22,22.64
  Top 2.185: 44.44,19.61 44.44,22.2
  Bottom 2.003: 7.13,23.56 9.13,23.56
S$219  (2 unrouted)
  Top 0: 2.22,22.64 2.26,22.66
  Top 2.185: 44.44,22.2 46.62,22.2
  Bottom 2.003: 9.13,23.56 9.13,21.56
S$220  (2 unrouted)
  Top 0: 2.26,22.66 2.24,22.79
  Top 2.185: 46.62,22.2 46.62,19.61
  Bottom 2.003: 9.13,21.56 7.13,21.56
S$221  (2 unrouted)
  Top 0: 2.24,22.79 2.18,22.84
  Top 2.185: 46.62,19.61 44.44,19.61
  Bottom 1.092: 57.27,16.18 56.23,17.22
S$222  (2 unrouted)
  Top 0: 2.18,22.84 2.12,22.9
  Top 2.185: 13.31,34.02 13.33,34
  Bottom 1.092: 56.23,17.22 56.52,17.51
S$223  (2 unrouted)
  Top 0: 2.12,22.9 2.02,22.91
  Top 2.185: 13.33,34 13.34,33.98
  Bottom 1.092: 56.52,17.51 57.56,16.47
S$224  (2 unrouted)
  Top 0: 2.82,22.88 2.76,22.92
  Top 2.185: 13.34,33.98 13.36,33.96
  Bottom 1.092: 57.56,16.47 57.27,16.18
S$225  (2 unrouted)
  Top 0: 2.76,22.92 2.73,22.91
  Top 2.185: 13.36,33.96 13.37,33.94
  Bottom 1.092: 55.38,33.39 55.38,35.09
S$226  (2 unrouted)
  Top 0: 2.73,22.91 2.71,22.89
  Top 2.185: 13.37,33.94 13.37,33.91
  Bottom 1.092: 55.38,35.09 57.09,35.09
S$227  (2 unrouted)
  Top 0: 2.71,22.89 2.67,22.86
  Top 2.185: 13.37,33.91 13.38,33.88
  Bottom 1.092: 57.09,35.09 57.09,33.39
S$228  (2 unrouted)
  Top 0: 2.67,22.86 2.63,22.82
  Top 2.185: 13.38,33.88 13.38,33.86
  Bottom 1.092: 57.09,33.39 55.38,33.39
S$229  (2 unrouted)
  Top 0: 2.63,22.82 2.58,22.78
  Top 2.185: 13.38,33.86 13.37,33.83
  Bottom 1.703: 44.39,14.86 44.39,17.55
S$230  (2 unrouted)
  Top 0: 2.58,22.78 2.45,22.66
  Top 2.185: 13.37,33.83 13.37,33.81
  Bottom 1.703: 44.39,17.55 46.67,17.55
S$231  (2 unrouted)
  Top 0: 2.45,22.66 2.44,22.89
  Top 2.185: 13.37,33.81 13.36,33.78
  Bottom 1.703: 46.67,17.55 46.67,14.86
S$232  (2 unrouted)
  Top 0: 2.44,22.89 2.41,22.9
  Top 2.185: 13.36,33.78 13.34,33.76
  Bottom 1.703: 46.67,14.86 44.39,14.86
S$233  (2 unrouted)
  Top 0: 2.41,22.9 2.38,22.91
  Top 2.185: 13.34,33.76 13.33,33.74
  Bottom 1.703: 37.4,14.86 37.4,17.55
S$234  (2 unrouted)
  Top 0: 2.38,22.91 2.36,22.92
  Top 2.185: 13.33,33.74 13.31,33.72
  Bottom 1.703: 37.4,17.55 39.69,17.55
S$235  (2 unrouted)
  Top 0: 2.36,22.92 2.34,22.91
  Top 2.185: 13.31,33.72 12.36,32.77
  Bottom 1.703: 39.69,17.55 39.69,14.86
S$236  (2 unrouted)
  Top 0: 2.34,22.91 2.32,22.89
  Top 2.185: 12.36,32.77 12.34,32.75
  Bottom 1.703: 39.69,14.86 37.4,14.86
S$237  (2 unrouted)
  Top 0: 2.32,22.89 2.29,22.86
  Top 2.185: 12.34,32.75 12.32,32.73
  Bottom 1.703: 34.07,16.48 34.07,18.31
S$238  (2 unrouted)
  Top 0: 2.29,22.86 2.29,22.25
  Top 2.185: 12.32,32.73 12.3,32.72
  Bottom 1.703: 34.07,18.31 35.66,18.31
S$239  (2 unrouted)
  Top 0: 2.29,22.25 2.32,22.22
  Top 2.185: 12.3,32.72 12.27,32.71
  Bottom 1.703: 35.66,18.31 35.66,16.48
S$240  (2 unrouted)
  Top 0: 2.32,22.22 2.33,22.21
  Top 2.185: 12.27,32.71 12.25,32.71
  Bottom 1.703: 35.66,16.48 34.07,16.48
S$241  (2 unrouted)
  Top 0: 2.33,22.21 2.34,22.2
  Top 2.185: 12.25,32.71 12.22,32.7
  Bottom 1.703: 30.89,16.48 30.89,18.31
S$242  (2 unrouted)
  Top 0: 2.34,22.2 2.36,22.2
  Top 2.185: 12.22,32.7 12.2,32.7
  Bottom 1.703: 30.89,18.31 32.47,18.31
S$243  (2 unrouted)
  Top 0: 2.36,22.2 2.37,22.2
  Top 2.185: 12.2,32.7 12.17,32.71
  Bottom 1.703: 32.47,18.31 32.47,16.48
S$244  (2 unrouted)
  Top 0: 2.37,22.2 2.38,22.2
  Top 2.185: 12.17,32.71 12.14,32.71
  Bottom 1.703: 32.47,16.48 30.89,16.48
S$245  (2 unrouted)
  Top 0: 2.38,22.2 2.39,22.2
  Top 2.185: 12.14,32.71 12.12,32.72
  Bottom 1.703: 34.07,14.15 34.07,15.98
S$246  (2 unrouted)
  Top 0: 2.39,22.2 2.41,22.21
  Top 2.185: 12.12,32.72 12.1,32.73
  Bottom 1.703: 34.07,15.98 35.66,15.98
S$247  (2 unrouted)
  Top 0: 2.41,22.21 2.42,22.22
  Top 2.185: 12.1,32.73 12.07,32.75
  Bottom 1.703: 35.66,15.98 35.66,14.15
S$248  (2 unrouted)
  Top 0: 2.42,22.22 2.44,22.25
  Top 2.185: 12.07,32.75 12.05,32.77
  Bottom 1.703: 35.66,14.15 34.07,14.15
S$249  (2 unrouted)
  Top 0: 2.44,22.25 2.44,22.43
  Top 2.185: 12.05,32.77 12.04,32.78
  Bottom 1.703: 30.89,14.15 30.89,15.98
S$250  (2 unrouted)
  Top 0: 2.44,22.43 2.47,22.46
  Top 2.185: 12.04,32.78 12.02,32.81
  Bottom 1.703: 30.89,15.98 32.47,15.98
S$251  (2 unrouted)
  Top 0: 2.47,22.46 2.48,22.46
  Top 2.185: 12.02,32.81 12.01,32.83
  Bottom 1.703: 32.47,15.98 32.47,14.15
S$252  (2 unrouted)
  Top 0: 2.48,22.46 2.49,22.47
  Top 2.185: 12.01,32.83 12,32.85
  Bottom 1.703: 32.47,14.15 30.89,14.15
S$253  (2 unrouted)
  Top 0: 2.49,22.47 2.5,22.47
  Top 2.185: 12,32.85 11.99,32.88
  Bottom 1.703: 37.4,19.56 37.4,22.25
S$254  (2 unrouted)
  Top 0: 2.5,22.47 2.51,22.46
  Top 2.185: 11.99,32.88 11.99,32.91
  Bottom 1.703: 37.4,22.25 39.69,22.25
S$255  (2 unrouted)
  Top 0: 2.51,22.46 2.53,22.43
  Top 2.185: 11.99,32.91 11.99,32.93
  Bottom 1.703: 39.69,22.25 39.69,19.56
S$256  (2 unrouted)
  Top 0: 2.53,22.43 2.56,22.39
  Top 2.185: 11.99,32.93 11.99,32.96
  Bottom 1.703: 39.69,19.56 37.4,19.56
S$257  (2 unrouted)
  Top 0: 2.56,22.39 2.6,22.34
  Top 2.185: 11.99,32.96 12,32.98
  Bottom 1.703: 44.39,19.56 44.39,22.25
S$258  (2 unrouted)
  Top 0: 2.6,22.34 2.69,22.21
  Top 2.185: 12,32.98 12.01,33.01
  Bottom 1.703: 44.39,22.25 46.67,22.25
S$259  (2 unrouted)
  Top 0: 2.69,22.21 2.77,22.19
  Top 2.185: 12.01,33.01 12.02,33.03
  Bottom 1.703: 46.67,22.25 46.67,19.56
S$260  (2 unrouted)
  Top 0: 2.77,22.19 2.8,22.21
  Top 2.185: 12.02,33.03 12.04,33.05
  Bottom 1.703: 46.67,19.56 44.39,19.56
S$261  (2 unrouted)
  Top 0: 2.8,22.21 2.82,22.23
  Top 2.185: 12.04,33.05 12.05,33.07
  Bottom 1.703: 30.89,21.14 30.89,22.96
S$262  (2 unrouted)
  Top 0: 2.82,22.23 2.82,22.3
  Top 2.185: 12.05,33.07 13.01,34.02
  Bottom 1.703: 30.89,22.96 32.47,22.96
S$263  (2 unrouted)
  Top 0: 2.82,22.3 2.72,22.44
  Top 2.185: 13.01,34.02 13.03,34.04
  Bottom 1.703: 32.47,22.96 32.47,21.14
S$264  (2 unrouted)
  Top 0: 2.72,22.44 2.68,22.49
  Top 2.185: 13.03,34.04 13.05,34.05
  Bottom 1.703: 32.47,21.14 30.89,21.14
S$265  (2 unrouted)
  Top 0: 2.68,22.49 2.65,22.54
  Top 2.185: 13.05,34.05 13.07,34.07
  Bottom 1.703: 34.07,21.14 34.07,22.96
S$266  (2 unrouted)
  Top 0: 2.65,22.54 2.62,22.57
  Top 2.185: 13.07,34.07 13.1,34.08
  Bottom 1.703: 34.07,22.96 35.66,22.96
S$267  (2 unrouted)
  Top 0: 2.62,22.57 2.62,22.59
  Top 2.185: 13.1,34.08 13.12,34.08
  Bottom 1.703: 35.66,22.96 35.66,21.14
S$268  (2 unrouted)
  Top 0: 2.62,22.59 2.62,22.6
  Top 2.185: 13.12,34.08 13.15,34.09
  Bottom 1.703: 35.66,21.14 34.07,21.14
S$269  (2 unrouted)
  Top 0: 2.62,22.6 2.65,22.63
  Top 2.185: 13.15,34.09 13.17,34.09
  Bottom 1.703: 30.89,18.81 30.89,20.64
S$270  (2 unrouted)
  Top 0: 2.65,22.63 2.68,22.66
  Top 2.185: 13.17,34.09 13.2,34.08
  Bottom 1.703: 30.89,20.64 32.47,20.64
S$271  (2 unrouted)
  Top 0: 2.68,22.66 2.72,22.7
  Top 2.185: 13.2,34.08 13.22,34.08
  Bottom 1.703: 32.47,20.64 32.47,18.81
S$272  (2 unrouted)
  Top 0: 2.72,22.7 2.82,22.8
  Top 2.185: 13.22,34.08 13.25,34.07
  Bottom 1.703: 32.47,18.81 30.89,18.81
S$273  (2 unrouted)
  Top 0: 2.82,22.8 2.82,22.88
  Top 2.185: 13.25,34.07 13.27,34.05
  Bottom 1.703: 34.07,18.81 34.07,20.64
S$274  (2 unrouted)
  Top 0: 2.08,20.38 1.73,20.38
  Top 2.185: 13.27,34.05 13.29,34.04
  Bottom 1.703: 34.07,20.64 35.66,20.64
S$275  (2 unrouted)
  Top 0: 1.73,20.38 1.71,20.34
  Top 2.185: 13.29,34.04 13.31,34.02
  Bottom 1.703: 35.66,20.64 35.66,18.81
S$276  (2 unrouted)
  Top 0: 1.71,20.34 1.69,20.31
  Top 2.185: 12.74,34.6 12.76,34.58
  Bottom 1.703: 35.66,18.81 34.07,18.81
S$277  (2 unrouted)
  Top 0: 1.69,20.31 1.69,19.73
  Top 2.185: 12.76,34.58 12.77,34.56
  Bottom 1.803: 12.19,32.6 12.15,32.61
S$278  (2 unrouted)
  Top 0: 1.69,19.73 1.72,19.69
  Top 2.185: 12.77,34.56 12.78,34.53
  Bottom 1.803: 12.15,32.61 12.11,32.61
S$279  (2 unrouted)
  Top 0: 1.72,19.69 1.74,19.66
  Top 2.185: 12.78,34.53 12.79,34.51
  Bottom 1.803: 12.11,32.61 12.08,32.63
S$280  (2 unrouted)
  Top 0: 1.74,19.66 1.77,19.66
  Top 2.185: 12.79,34.51 12.8,34.48
  Bottom 1.803: 12.08,32.63 12.04,32.65
S$281  (2 unrouted)
  Top 0: 1.77,19.66 1.79,19.66
  Top 2.185: 12.8,34.48 12.8,34.46
  Bottom 1.803: 12.04,32.65 12.01,32.67
S$282  (2 unrouted)
  Top 0: 1.79,19.66 1.8,19.66
  Top 2.185: 12.8,34.46 12.8,34.43
  Bottom 1.803: 12.01,32.67 11.98,32.69
S$283  (2 unrouted)
  Top 0: 1.8,19.66 1.81,19.67
  Top 2.185: 12.8,34.43 12.8,34.41
  Bottom 1.803: 11.98,32.69 11.96,32.72
S$284  (2 unrouted)
  Top 0: 1.81,19.67 1.82,19.68
  Top 2.185: 12.8,34.41 12.79,34.38
  Bottom 1.803: 11.96,32.72 11.94,32.75
S$285  (2 unrouted)
  Top 0: 1.82,19.68 1.84,19.7
  Top 2.185: 12.79,34.38 12.78,34.36
  Bottom 1.803: 11.94,32.75 11.92,32.79
S$286  (2 unrouted)
  Top 0: 1.84,19.7 1.84,19.95
  Top 2.185: 12.78,34.36 12.77,34.33
  Bottom 1.803: 11.92,32.79 11.9,32.83
S$287  (2 unrouted)
  Top 0: 1.84,19.95 1.94,19.95
  Top 2.185: 12.77,34.33 12.76,34.31
  Bottom 1.803: 11.9,32.83 11.89,32.86
S$288  (2 unrouted)
  Top 0: 1.94,19.95 2.09,19.69
  Top 2.185: 12.76,34.31 12.74,34.29
  Bottom 1.803: 11.89,32.86 11.89,32.9
S$289  (2 unrouted)
  Top 0: 2.09,19.69 2.12,19.67
  Top 2.185: 12.74,34.29 11.79,33.34
  Bottom 1.803: 11.89,32.9 11.89,32.94
S$290  (2 unrouted)
  Top 0: 2.12,19.67 2.16,19.65
  Top 2.185: 11.79,33.34 11.77,33.32
  Bottom 1.803: 11.89,32.94 11.89,32.98
S$291  (2 unrouted)
  Top 0: 2.16,19.65 2.24,19.7
  Top 2.185: 11.77,33.32 11.74,33.31
  Bottom 1.803: 11.89,32.98 11.9,33.01
S$292  (2 unrouted)
  Top 0: 2.24,19.7 2.24,19.72
  Top 2.185: 11.74,33.31 11.72,33.3
  Bottom 1.803: 11.9,33.01 11.92,33.05
S$293  (2 unrouted)
  Top 0: 2.24,19.72 2.23,19.74
  Top 2.185: 11.72,33.3 11.7,33.29
  Bottom 1.803: 11.92,33.05 11.94,33.08
S$294  (2 unrouted)
  Top 0: 2.23,19.74 2.22,19.77
  Top 2.185: 11.7,33.29 11.67,33.28
  Bottom 1.803: 11.94,33.08 11.96,33.12
S$295  (2 unrouted)
  Top 0: 2.22,19.77 2.2,19.81
  Top 2.185: 11.67,33.28 11.65,33.28
  Bottom 1.803: 11.96,33.12 11.98,33.14
S$296  (2 unrouted)
  Top 0: 2.2,19.81 2.17,19.86
  Top 2.185: 11.65,33.28 11.62,33.28
  Bottom 1.803: 11.98,33.14 12.94,34.1
S$297  (2 unrouted)
  Top 0: 2.17,19.86 2.1,19.97
  Top 2.185: 11.62,33.28 11.59,33.28
  Bottom 1.803: 12.94,34.1 12.96,34.12
S$298  (2 unrouted)
  Top 0: 2.1,19.97 2.13,19.99
  Top 2.185: 11.59,33.28 11.57,33.29
  Bottom 1.803: 12.96,34.12 12.99,34.14
S$299  (2 unrouted)
  Top 0: 2.13,19.99 2.14,20
  Top 2.185: 11.57,33.29 11.54,33.3
  Bottom 1.803: 12.99,34.14 13.03,34.16
S$300  (2 unrouted)
  Top 0: 2.14,20 2.15,20.01
  Top 2.185: 11.54,33.3 11.52,33.31
  Bottom 1.803: 13.03,34.16 13.06,34.17
S$301  (2 unrouted)
  Top 0: 2.15,20.01 2.17,20.02
  Top 2.185: 11.52,33.31 11.5,33.32
  Bottom 1.803: 13.06,34.17 13.1,34.18
S$302  (2 unrouted)
  Top 0: 2.17,20.02 2.18,20.02
  Top 2.185: 11.5,33.32 11.48,33.34
  Bottom 1.803: 13.1,34.18 13.14,34.19
S$303  (2 unrouted)
  Top 0: 2.18,20.02 2.19,20.03
  Top 2.185: 11.48,33.34 11.46,33.36
  Bottom 1.803: 13.14,34.19 13.18,34.19
S$304  (2 unrouted)
  Top 0: 2.19,20.03 2.2,20.05
  Top 2.185: 11.46,33.36 11.45,33.38
  Bottom 1.803: 13.18,34.19 13.22,34.18
S$305  (2 unrouted)
  Top 0: 2.2,20.05 2.21,20.07
  Top 2.185: 11.45,33.38 11.44,33.41
  Bottom 1.803: 13.22,34.18 13.25,34.17
S$306  (2 unrouted)
  Top 0: 2.21,20.07 2.24,20.11
  Top 2.185: 11.44,33.41 11.43,33.43
  Bottom 1.803: 13.25,34.17 13.29,34.16
S$307  (2 unrouted)
  Top 0: 2.24,20.11 2.24,20.22
  Top 2.185: 11.43,33.43 11.42,33.45
  Bottom 1.803: 13.29,34.16 13.32,34.14
S$308  (2 unrouted)
  Top 0: 2.24,20.22 2.16,20.33
  Top 2.185: 11.42,33.45 11.42,33.48
  Bottom 1.803: 13.32,34.14 13.36,34.12
S$309  (2 unrouted)
  Top 0: 2.16,20.33 2.12,20.35
  Top 2.185: 11.42,33.48 11.42,33.51
  Bottom 1.803: 13.36,34.12 13.38,34.09
S$310  (2 unrouted)
  Top 0: 2.12,20.35 2.08,20.38
  Top 2.185: 11.42,33.51 11.42,33.53
  Bottom 1.803: 13.38,34.09 13.41,34.07
S$311  (2 unrouted)
  Top 0: 3.31,20.38 2.86,20.38
  Top 2.185: 11.42,33.53 11.43,33.56
  Bottom 1.803: 13.41,34.07 13.43,34.03
S$312  (2 unrouted)
  Top 0: 2.86,20.38 2.84,20.33
  Top 2.185: 11.43,33.56 11.44,33.58
  Bottom 1.803: 13.43,34.03 13.45,34
S$313  (2 unrouted)
  Top 0: 2.84,20.33 2.82,20.29
  Top 2.185: 11.44,33.58 11.45,33.6
  Bottom 1.803: 13.45,34 13.46,33.97
S$314  (2 unrouted)
  Top 0: 2.82,20.29 2.88,20.22
  Top 2.185: 11.45,33.6 11.46,33.63
  Bottom 1.803: 13.46,33.97 13.47,33.93
S$315  (2 unrouted)
  Top 0: 2.88,20.22 2.95,20.22
  Top 2.185: 11.46,33.63 11.48,33.65
  Bottom 1.803: 13.47,33.93 13.48,33.89
S$316  (2 unrouted)
  Top 0: 2.95,20.22 3.02,20.21
  Top 2.185: 11.48,33.65 12.43,34.6
  Bottom 1.803: 13.48,33.89 13.48,33.85
S$317  (2 unrouted)
  Top 0: 3.02,20.21 3.04,19.68
  Top 2.185: 12.43,34.6 12.45,34.62
  Bottom 1.803: 13.48,33.85 13.47,33.81
S$318  (2 unrouted)
  Top 0: 3.04,19.68 3.1,19.65
  Top 2.185: 12.45,34.62 12.47,34.63
  Bottom 1.803: 13.47,33.81 13.46,33.77
S$319  (2 unrouted)
  Top 0: 3.1,19.65 3.16,19.68
  Top 2.185: 12.47,34.63 12.5,34.64
  Bottom 1.803: 13.46,33.77 13.45,33.74
S$320  (2 unrouted)
  Top 0: 3.16,19.68 3.17,20.21
  Top 2.185: 12.5,34.64 12.52,34.65
  Bottom 1.803: 13.45,33.74 13.43,33.71
S$321  (2 unrouted)
  Top 0: 3.17,20.21 3.31,20.22
  Top 2.185: 12.52,34.65 12.55,34.66
  Bottom 1.803: 13.43,33.71 13.41,33.67
S$322  (2 unrouted)
  Top 0: 3.31,20.22 3.34,20.25
  Top 2.185: 12.55,34.66 12.57,34.66
  Bottom 1.803: 13.41,33.67 12.4,32.67
S$323  (2 unrouted)
  Top 0: 3.34,20.25 3.36,20.27
  Top 2.185: 12.57,34.66 12.6,34.66
  Bottom 1.803: 12.4,32.67 12.37,32.65
S$324  (2 unrouted)
  Top 0: 3.36,20.27 3.37,20.3
  Top 2.185: 12.6,34.66 12.62,34.66
  Bottom 1.803: 12.37,32.65 12.34,32.63
S$325  (2 unrouted)
  Top 0: 3.37,20.3 3.36,20.32
  Top 2.185: 12.62,34.66 12.65,34.65
  Bottom 1.803: 12.34,32.63 12.3,32.61
S$326  (2 unrouted)
  Top 0: 3.36,20.32 3.34,20.35
  Top 2.185: 12.65,34.65 12.67,34.64
  Bottom 1.803: 12.3,32.61 12.27,32.61
S$327  (2 unrouted)
  Top 0: 3.34,20.35 3.31,20.38
  Top 2.185: 12.67,34.64 12.7,34.63
  Bottom 1.803: 12.27,32.61 12.23,32.6
S$328  (2 unrouted)
  Top 0: 3.2,25.45 2.9,25.46
  Top 2.185: 12.7,34.63 12.72,34.62
  Bottom 1.803: 12.23,32.6 12.19,32.6
S$329  (2 unrouted)
  Top 0: 2.9,25.46 2.84,25.39
  Top 2.185: 12.72,34.62 12.74,34.6
  Bottom 1.803: 11.61,33.18 11.57,33.18
S$330  (2 unrouted)
  Top 0: 2.84,25.39 2.77,25.46
  Top 2.185: 11.05,36.29 11.07,36.27
  Bottom 1.803: 11.57,33.18 11.54,33.19
S$331  (2 unrouted)
  Top 0: 2.77,25.46 2.74,25.45
  Top 2.185: 11.07,36.27 11.08,36.24
  Bottom 1.803: 11.54,33.19 11.5,33.2
S$332  (2 unrouted)
  Top 0: 2.74,25.45 2.73,25.45
  Top 2.185: 11.08,36.24 11.09,36.22
  Bottom 1.803: 11.5,33.2 11.47,33.22
S$333  (2 unrouted)
  Top 0: 2.73,25.45 2.72,25.45
  Top 2.185: 11.09,36.22 11.1,36.2
  Bottom 1.803: 11.47,33.22 11.44,33.24
S$334  (2 unrouted)
  Top 0: 2.72,25.45 2.71,25.44
  Top 2.185: 11.1,36.2 11.11,36.17
  Bottom 1.803: 11.44,33.24 11.41,33.27
S$335  (2 unrouted)
  Top 0: 2.71,25.44 2.7,25.44
  Top 2.185: 11.11,36.17 11.11,36.15
  Bottom 1.803: 11.41,33.27 11.38,33.3
S$336  (2 unrouted)
  Top 0: 2.7,25.44 2.69,25.44
  Top 2.185: 11.11,36.15 11.11,36.12
  Bottom 1.803: 11.38,33.3 11.36,33.33
S$337  (2 unrouted)
  Top 0: 2.69,25.44 2.68,25.11
  Top 2.185: 11.11,36.12 11.11,36.09
  Bottom 1.803: 11.36,33.33 11.34,33.36
S$338  (2 unrouted)
  Top 0: 2.68,25.11 2.65,25.1
  Top 2.185: 11.11,36.09 11.1,36.07
  Bottom 1.803: 11.34,33.36 11.33,33.4
S$339  (2 unrouted)
  Top 0: 2.65,25.1 2.63,25.1
  Top 2.185: 11.1,36.07 11.09,36.05
  Bottom 1.803: 11.33,33.4 11.32,33.44
S$340  (2 unrouted)
  Top 0: 2.63,25.1 2.63,25.12
  Top 2.185: 11.09,36.05 11.08,36.02
  Bottom 1.803: 11.32,33.44 11.31,33.47
S$341  (2 unrouted)
  Top 0: 2.63,25.12 2.63,25.13
  Top 2.185: 11.08,36.02 11.07,36
  Bottom 1.803: 11.31,33.47 11.31,33.51
S$342  (2 unrouted)
  Top 0: 2.63,25.13 2.63,25.14
  Top 2.185: 11.07,36 11.05,35.98
  Bottom 1.803: 11.31,33.51 11.32,33.55
S$343  (2 unrouted)
  Top 0: 2.63,25.14 2.63,25.15
  Top 2.185: 11.05,35.98 10.1,35.03
  Bottom 1.803: 11.32,33.55 11.33,33.59
S$344  (2 unrouted)
  Top 0: 2.63,25.15 2.62,25.15
  Top 2.185: 10.1,35.03 10.08,35.01
  Bottom 1.803: 11.33,33.59 11.34,33.62
S$345  (2 unrouted)
  Top 0: 2.62,25.15 2.61,25.17
  Top 2.185: 10.08,35.01 10.06,35
  Bottom 1.803: 11.34,33.62 11.36,33.66
S$346  (2 unrouted)
  Top 0: 2.61,25.17 2.59,25.2
  Top 2.185: 10.06,35 10.03,34.98
  Bottom 1.803: 11.36,33.66 11.38,33.69
S$347  (2 unrouted)
  Top 0: 2.59,25.2 2.56,25.24
  Top 2.185: 10.03,34.98 10.01,34.98
  Bottom 1.803: 11.38,33.69 11.41,33.72
S$348  (2 unrouted)
  Top 0: 2.56,25.24 2.49,25.34
  Top 2.185: 10.01,34.98 9.98,34.97
  Bottom 1.803: 11.41,33.72 12.36,34.67
S$349  (2 unrouted)
  Top 0: 2.49,25.34 2.46,25.39
  Top 2.185: 9.98,34.97 9.96,34.97
  Bottom 1.803: 12.36,34.67 12.39,34.7
S$350  (2 unrouted)
  Top 0: 2.46,25.39 2.43,25.42
  Top 2.185: 9.96,34.97 9.93,34.97
  Bottom 1.803: 12.39,34.7 12.42,34.72
S$351  (2 unrouted)
  Top 0: 2.43,25.42 2.41,25.44
  Top 2.185: 9.93,34.97 9.91,34.97
  Bottom 1.803: 12.42,34.72 12.45,34.73
S$352  (2 unrouted)
  Top 0: 2.41,25.44 2.39,25.45
  Top 2.185: 9.91,34.97 9.88,34.98
  Bottom 1.803: 12.45,34.73 12.49,34.75
S$353  (2 unrouted)
  Top 0: 2.39,25.45 2.37,25.46
  Top 2.185: 9.88,34.98 9.86,34.98
  Bottom 1.803: 12.49,34.75 12.53,34.76
S$354  (2 unrouted)
  Top 0: 2.37,25.46 2.35,25.45
  Top 2.185: 9.86,34.98 9.83,35
  Bottom 1.803: 12.53,34.76 12.56,34.76
S$355  (2 unrouted)
  Top 0: 2.35,25.45 2.32,25.44
  Top 2.185: 9.83,35 9.81,35.01
  Bottom 1.803: 12.56,34.76 12.61,34.76
S$356  (2 unrouted)
  Top 0: 2.32,25.44 2.29,25.42
  Top 2.185: 9.81,35.01 9.79,35.03
  Bottom 1.803: 12.61,34.76 12.64,34.76
S$357  (2 unrouted)
  Top 0: 2.29,25.42 2.29,24.79
  Top 2.185: 9.79,35.03 9.78,35.05
  Bottom 1.803: 12.64,34.76 12.68,34.75
S$358  (2 unrouted)
  Top 0: 2.29,24.79 2.32,24.77
  Top 2.185: 9.78,35.05 9.76,35.07
  Bottom 1.803: 12.68,34.75 12.71,34.73
S$359  (2 unrouted)
  Top 0: 2.32,24.77 2.33,24.75
  Top 2.185: 9.76,35.07 9.75,35.09
  Bottom 1.803: 12.71,34.73 12.75,34.72
S$360  (2 unrouted)
  Top 0: 2.33,24.75 2.34,24.75
  Top 2.185: 9.75,35.09 9.74,35.12
  Bottom 1.803: 12.75,34.72 12.78,34.7
S$361  (2 unrouted)
  Top 0: 2.34,24.75 2.36,24.74
  Top 2.185: 9.74,35.12 9.73,35.14
  Bottom 1.803: 12.78,34.7 12.81,34.67
S$362  (2 unrouted)
  Top 0: 2.36,24.74 2.37,24.74
  Top 2.185: 9.73,35.14 9.73,35.17
  Bottom 1.803: 12.81,34.67 12.83,34.64
S$363  (2 unrouted)
  Top 0: 2.37,24.74 2.38,24.74
  Top 2.185: 9.73,35.17 9.73,35.2
  Bottom 1.803: 12.83,34.64 12.86,34.61
S$364  (2 unrouted)
  Top 0: 2.38,24.74 2.39,24.75
  Top 2.185: 9.73,35.2 9.73,35.22
  Bottom 1.803: 12.86,34.61 12.88,34.58
S$365  (2 unrouted)
  Top 0: 2.39,24.75 2.41,24.75
  Top 2.185: 9.73,35.22 9.74,35.25
  Bottom 1.803: 12.88,34.58 12.89,34.54
S$366  (2 unrouted)
  Top 0: 2.41,24.75 2.42,24.77
  Top 2.185: 9.74,35.25 9.75,35.27
  Bottom 1.803: 12.89,34.54 12.9,34.5
S$367  (2 unrouted)
  Top 0: 2.42,24.77 2.44,24.79
  Top 2.185: 9.75,35.27 9.76,35.29
  Bottom 1.803: 12.9,34.5 12.9,34.47
S$368  (2 unrouted)
  Top 0: 2.44,24.79 2.44,25.1
  Top 2.185: 9.76,35.29 9.78,35.31
  Bottom 1.803: 12.9,34.47 12.9,34.42
S$369  (2 unrouted)
  Top 0: 2.44,25.1 2.46,25.09
  Top 2.185: 9.78,35.31 9.79,35.33
  Bottom 1.803: 12.9,34.42 12.9,34.39
S$370  (2 unrouted)
  Top 0: 2.46,25.09 2.48,25.07
  Top 2.185: 9.79,35.33 10.74,36.29
  Bottom 1.803: 12.9,34.39 12.89,34.35
S$371  (2 unrouted)
  Top 0: 2.48,25.07 2.51,25.04
  Top 2.185: 10.74,36.29 10.76,36.3
  Bottom 1.803: 12.89,34.35 12.88,34.31
S$372  (2 unrouted)
  Top 0: 2.51,25.04 2.54,24.98
  Top 2.185: 10.76,36.3 10.79,36.32
  Bottom 1.803: 12.88,34.31 12.86,34.28
S$373  (2 unrouted)
  Top 0: 2.54,24.98 2.58,24.92
  Top 2.185: 10.79,36.32 10.81,36.33
  Bottom 1.803: 12.86,34.28 12.83,34.25
S$374  (2 unrouted)
  Top 0: 2.58,24.92 2.65,24.83
  Top 2.185: 10.81,36.33 10.83,36.34
  Bottom 1.803: 12.83,34.25 12.81,34.22
S$375  (2 unrouted)
  Top 0: 2.65,24.83 2.7,24.77
  Top 2.185: 10.83,36.34 10.86,36.35
  Bottom 1.803: 12.81,34.22 11.86,33.27
S$376  (2 unrouted)
  Top 0: 2.7,24.77 2.73,24.73
  Top 2.185: 10.86,36.35 10.88,36.35
  Bottom 1.803: 11.86,33.27 11.83,33.24
S$377  (2 unrouted)
  Top 0: 2.73,24.73 2.76,24.72
  Top 2.185: 10.88,36.35 10.91,36.35
  Bottom 1.803: 11.83,33.24 11.8,33.22
S$378  (2 unrouted)
  Top 0: 2.76,24.72
  Top 2.185: 10.91,36.35 10.94,36.35
  Bottom 1.803: 11.8,33.22 11.76,33.2
S$379  (2 unrouted)
  Top 0: 2.76,24.72 2.78,24.73
  Top 2.185: 10.94,36.35 10.96,36.34
  Bottom 1.803: 11.76,33.2 11.73,33.19
S$380  (2 unrouted)
  Top 0: 2.78,24.73 2.79,24.75
  Top 2.185: 10.96,36.34 10.98,36.33
  Bottom 1.803: 11.73,33.19 11.69,33.18
S$381  (2 unrouted)
  Top 0: 2.79,24.75 2.81,24.76
  Top 2.185: 10.98,36.33 11.01,36.32
  Bottom 1.803: 11.69,33.18 11.65,33.18
S$382  (2 unrouted)
  Top 0: 2.81,24.76 2.85,24.8
  Top 2.185: 11.01,36.32 11.03,36.3
  Bottom 1.803: 11.65,33.18 11.61,33.18
S$383  (2 unrouted)
  Top 0: 2.85,24.8 2.92,24.73
  Top 2.185: 11.03,36.3 11.05,36.29
  Bottom 1.803: 9.93,34.87 9.89,34.87
S$384  (2 unrouted)
  Top 0: 2.92,24.73 3.2,24.75
  Top 2.185: 9.92,37.42 9.94,37.4
  Bottom 1.803: 9.89,34.87 9.85,34.88
S$385  (2 unrouted)
  Top 0: 3.2,24.75 3.29,24.81
  Top 2.185: 9.94,37.4 9.95,37.38
  Bottom 1.803: 9.85,34.88 9.81,34.89
S$386  (2 unrouted)
  Top 0: 3.29,24.81 3.33,24.88
  Top 2.185: 9.95,37.38 9.96,37.35
  Bottom 1.803: 9.81,34.89 9.78,34.91
S$387  (2 unrouted)
  Top 0: 3.33,24.88 3.38,24.95
  Top 2.185: 9.96,37.35 9.97,37.33
  Bottom 1.803: 9.78,34.91 9.75,34.93
S$388  (2 unrouted)
  Top 0: 3.38,24.95 3.38,25.1
  Top 2.185: 9.97,37.33 9.98,37.3
  Bottom 1.803: 9.75,34.93 9.72,34.96
S$389  (2 unrouted)
  Top 0: 3.38,25.1 3.38,25.25
  Top 2.185: 9.98,37.3 9.98,37.28
  Bottom 1.803: 9.72,34.96 9.7,34.99
S$390  (2 unrouted)
  Top 0: 3.38,25.25 3.29,25.39
  Top 2.185: 9.98,37.28 9.98,37.25
  Bottom 1.803: 9.7,34.99 9.67,35.02
S$391  (2 unrouted)
  Top 0: 3.29,25.39 3.24,25.42
  Top 2.185: 9.98,37.25 9.98,37.23
  Bottom 1.803: 9.67,35.02 9.65,35.05
S$392  (2 unrouted)
  Top 0: 3.24,25.42 3.2,25.45
  Top 2.185: 9.98,37.23 9.97,37.2
  Bottom 1.803: 9.65,35.05 9.64,35.09
S$393  (2 unrouted)
  Top 0: 3.1,25.3 3.04,25.31
  Top 2.185: 9.97,37.2 9.96,37.18
  Bottom 1.803: 9.64,35.09 9.63,35.12
S$394  (2 unrouted)
  Top 0: 3.04,25.31 3.01,25.28
  Top 2.185: 9.96,37.18 9.95,37.15